# Altium PCB EEU_SSSHIpin.PcbDoc (part 1 of 2)
Units mil, origin at the board's own origin, x right, y up, seen from the top; angles counter-clockwise.
Board outline 6000 x 4000 mil, 2 copper layers (Top Layer, Bottom Layer); 240 components, 16 nets, 1184 pads, 256 vias.
Unrouted connection lines stored in the file: 240.
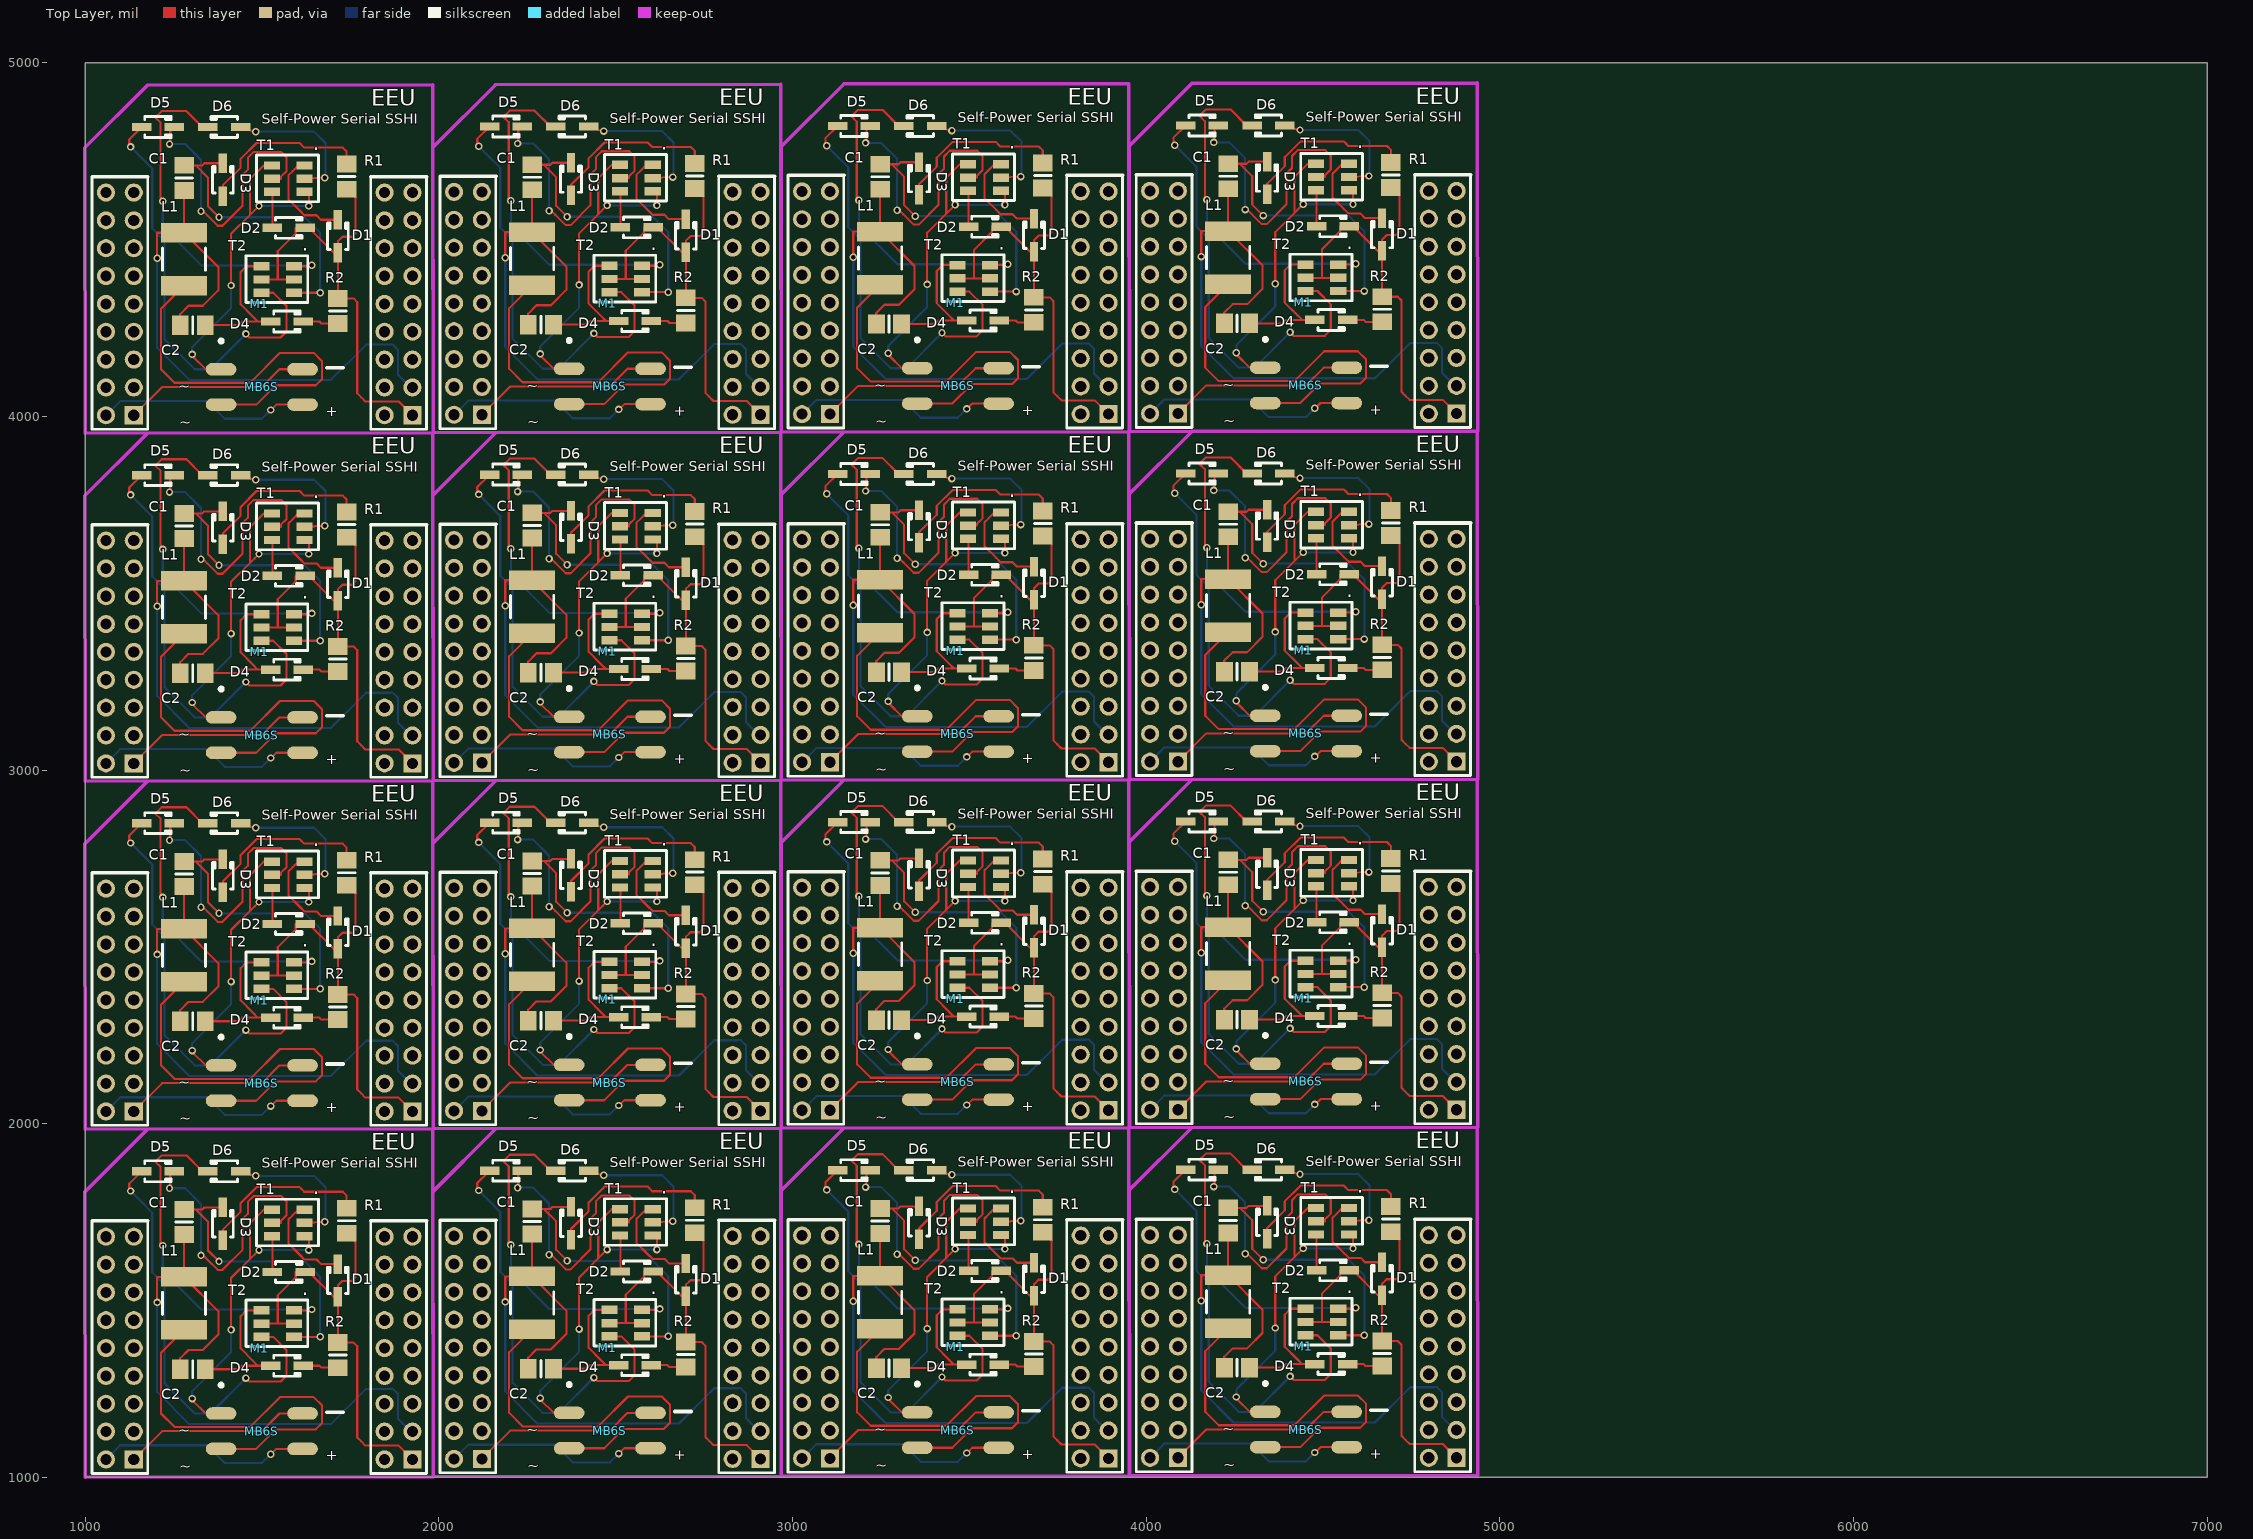
[diagram p0: Top Layer view]
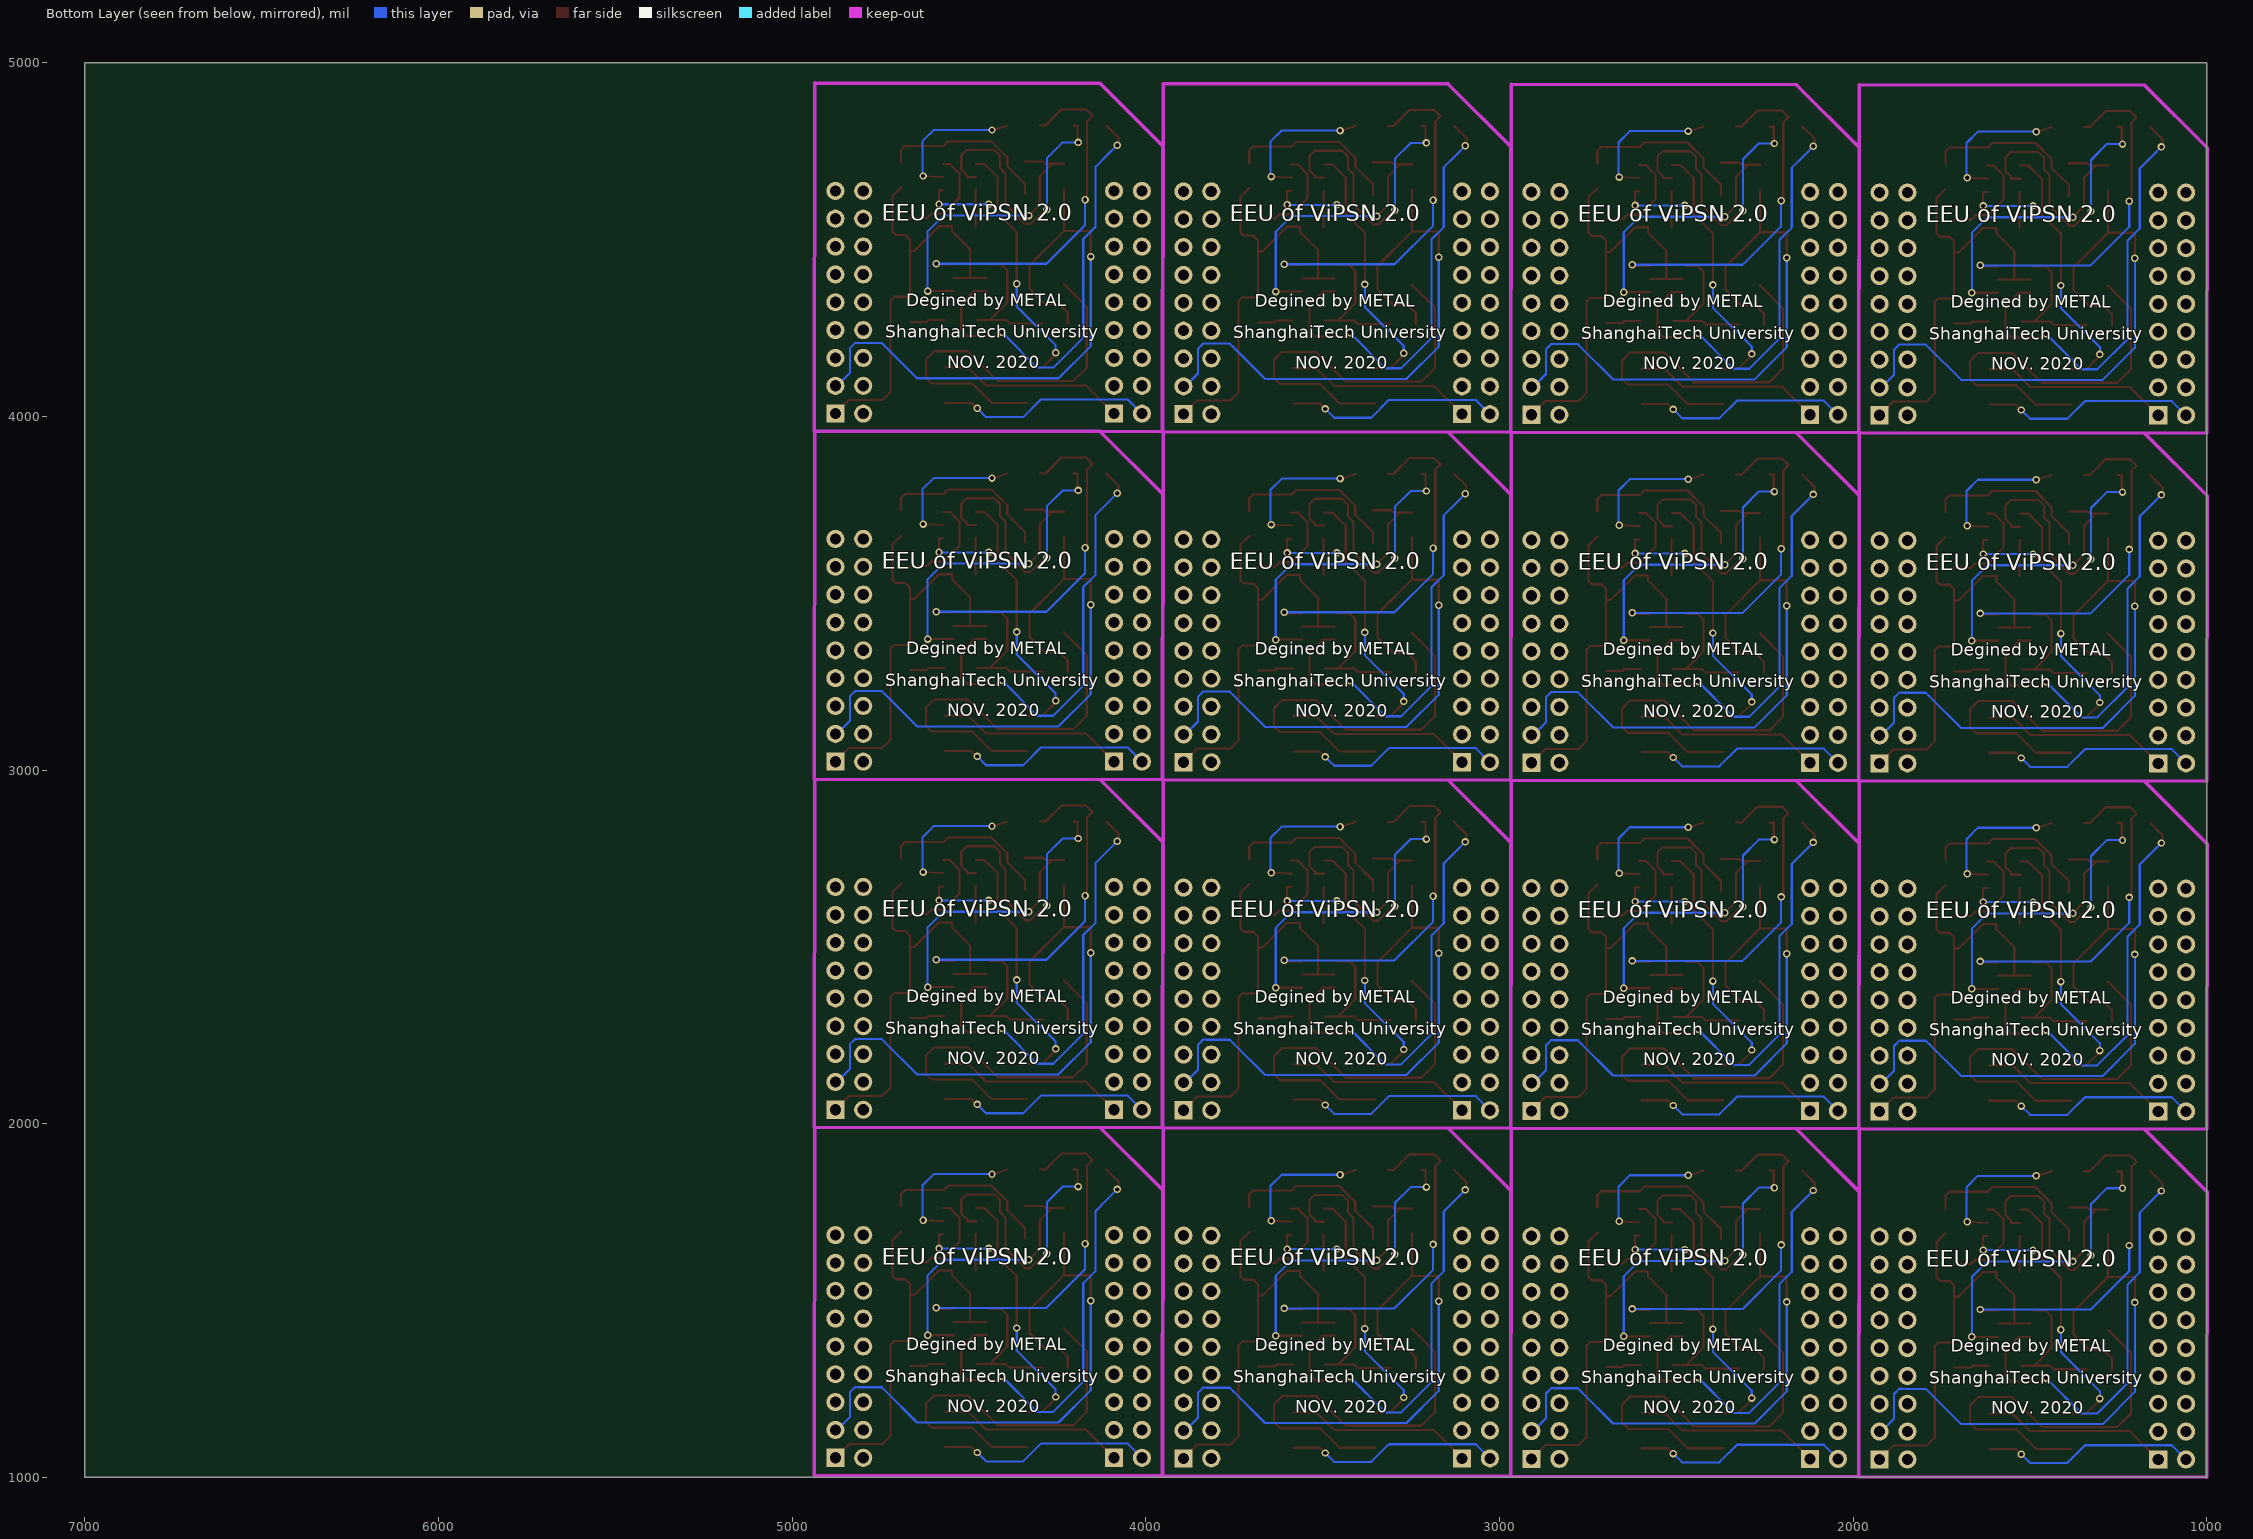
[diagram p1: Bottom Layer view, seen from below]

## Layer stack, top to bottom
Top Layer: signal copper 1.4
Dielectric: dielectric 12.6, FR-4, Dk 4.8
Bottom Layer: signal copper 1.4

## Board outline
1000,1000 7000,1000 7000,5000 1000,5000

## Design rules (kind name [scope] priority, off if disabled: settings)
Clearance [All] p1: gap=10
PolygonConnect [All] p1: connectstyle=Relief reliefconductorwidth=10 reliefentries=4 polygonreliefangle="90 Angle"
RoutingVias [All] p1: holewidth=28 width=50 viastyle="Through Hole" minholewidth=28 minwidth=50 maxholewidth=28 maxwidth=50
SilkscreenOverComponentPads [All] p1: minsilkscreentomaskgap=10
SolderMaskExpansion [All] p1: expansion=4
Width [All] p1: maxlimit=10 minlimit=10 preferedwidth=10
27 further rules are at their usual default settings.

## Components (designator, comment, footprint, x,y, rotation, side; value= is the part's Value field where it differs from the comment)
C1 "CAP" 6-0805_N 4231.76,4679.5 r90 top
C1 "CAP" 6-0805_N 4231.76,3695.25 r90 top
C1 "CAP" 6-0805_N 4231.76,2710.99 r90 top
C1 "CAP" 6-0805_N 4231.76,1726.74 r90 top
C1 "CAP" 6-0805_N 3247.51,4677.95 r90 top
C1 "CAP" 6-0805_N 3247.51,3693.7 r90 top
C1 "CAP" 6-0805_N 3247.51,2709.45 r90 top
C1 "CAP" 6-0805_N 3247.51,1725.19 r90 top
C1 "CAP" 6-0805_N 2263.26,4676.4 r90 top
C1 "CAP" 6-0805_N 2263.26,3692.15 r90 top
C1 "CAP" 6-0805_N 2263.26,2707.9 r90 top
C1 "CAP" 6-0805_N 2263.26,1723.65 r90 top
C1 "CAP" 6-0805_N 1279,4674.85 r90 top
C1 "CAP" 6-0805_N 1279,3690.6 r90 top
C1 "CAP" 6-0805_N 1279,2706.35 r90 top
C1 "CAP" 6-0805_N 1279,1722.1 r90 top
C2 "CAP" 6-0805_N 4256.76,4263.2 r0 top
C2 "CAP" 6-0805_N 4256.76,3278.95 r0 top
C2 "CAP" 6-0805_N 4256.76,2294.69 r0 top
C2 "CAP" 6-0805_N 4256.76,1310.44 r0 top
C2 "CAP" 6-0805_N 3272.51,4261.65 r0 top
C2 "CAP" 6-0805_N 3272.51,3277.4 r0 top
C2 "CAP" 6-0805_N 3272.51,2293.15 r0 top
C2 "CAP" 6-0805_N 3272.51,1308.89 r0 top
C2 "CAP" 6-0805_N 2288.26,4260.1 r0 top
C2 "CAP" 6-0805_N 2288.26,3275.85 r0 top
C2 "CAP" 6-0805_N 2288.26,2291.6 r0 top
C2 "CAP" 6-0805_N 2288.26,1307.35 r0 top
C2 "CAP" 6-0805_N 1304,4258.55 r0 top
C2 "CAP" 6-0805_N 1304,3274.3 r0 top
C2 "CAP" 6-0805_N 1304,2290.05 r0 top
C2 "CAP" 6-0805_N 1304,1305.8 r0 top
D1 "NRS0240H" SOD323 4666.76,4468.2 r90 top
D1 "NRS0240H" SOD323 4666.76,3483.95 r90 top
D1 "NRS0240H" SOD323 4666.76,2499.69 r90 top
D1 "NRS0240H" SOD323 4666.76,1515.44 r90 top
D1 "NRS0240H" SOD323 3682.51,4466.65 r90 top
D1 "NRS0240H" SOD323 3682.51,3482.4 r90 top
D1 "NRS0240H" SOD323 3682.51,2498.15 r90 top
D1 "NRS0240H" SOD323 3682.51,1513.89 r90 top
D1 "NRS0240H" SOD323 2698.26,4465.1 r90 top
D1 "NRS0240H" SOD323 2698.26,3480.85 r90 top
D1 "NRS0240H" SOD323 2698.26,2496.6 r90 top
D1 "NRS0240H" SOD323 2698.26,1512.35 r90 top
D1 "NRS0240H" SOD323 1714,4463.55 r90 top
D1 "NRS0240H" SOD323 1714,3479.3 r90 top
D1 "NRS0240H" SOD323 1714,2495.05 r90 top
D1 "NRS0240H" SOD323 1714,1510.8 r90 top
D2 "NRS0240H" SOD323 4481.76,4538.2 r0 top
D2 "NRS0240H" SOD323 4481.76,3553.95 r0 top
D2 "NRS0240H" SOD323 4481.76,2569.69 r0 top
D2 "NRS0240H" SOD323 4481.76,1585.44 r0 top
D2 "NRS0240H" SOD323 3497.51,4536.65 r0 top
D2 "NRS0240H" SOD323 3497.51,3552.4 r0 top
D2 "NRS0240H" SOD323 3497.51,2568.15 r0 top
D2 "NRS0240H" SOD323 3497.51,1583.89 r0 top
D2 "NRS0240H" SOD323 2513.26,4535.1 r0 top
D2 "NRS0240H" SOD323 2513.26,3550.85 r0 top
D2 "NRS0240H" SOD323 2513.26,2566.6 r0 top
D2 "NRS0240H" SOD323 2513.26,1582.35 r0 top
D2 "NRS0240H" SOD323 1529,4533.55 r0 top
D2 "NRS0240H" SOD323 1529,3549.3 r0 top
D2 "NRS0240H" SOD323 1529,2565.05 r0 top
D2 "NRS0240H" SOD323 1529,1580.8 r0 top
D3 "NRS0240H" SOD323 4341.76,4628.2 r90 top
D3 "NRS0240H" SOD323 4341.76,3643.95 r90 top
D3 "NRS0240H" SOD323 4341.76,2659.69 r90 top
D3 "NRS0240H" SOD323 4341.76,1675.44 r90 top
D3 "NRS0240H" SOD323 3357.51,4626.65 r90 top
D3 "NRS0240H" SOD323 3357.51,3642.4 r90 top
D3 "NRS0240H" SOD323 3357.51,2658.15 r90 top
D3 "NRS0240H" SOD323 3357.51,1673.89 r90 top
D3 "NRS0240H" SOD323 2373.26,4625.1 r90 top
D3 "NRS0240H" SOD323 2373.26,3640.85 r90 top
D3 "NRS0240H" SOD323 2373.26,2656.6 r90 top
D3 "NRS0240H" SOD323 2373.26,1672.35 r90 top
D3 "NRS0240H" SOD323 1389,4623.55 r90 top
D3 "NRS0240H" SOD323 1389,3639.3 r90 top
D3 "NRS0240H" SOD323 1389,2655.05 r90 top
D3 "NRS0240H" SOD323 1389,1670.8 r90 top
D4 "NRS0240H" SOD323 4476.76,4273.2 r0 top
D4 "NRS0240H" SOD323 4476.76,3288.95 r0 top
D4 "NRS0240H" SOD323 4476.76,2304.69 r0 top
D4 "NRS0240H" SOD323 4476.76,1320.44 r0 top
D4 "NRS0240H" SOD323 3492.51,4271.65 r0 top
D4 "NRS0240H" SOD323 3492.51,3287.4 r0 top
D4 "NRS0240H" SOD323 3492.51,2303.15 r0 top
D4 "NRS0240H" SOD323 3492.51,1318.89 r0 top
D4 "NRS0240H" SOD323 2508.26,4270.1 r0 top
D4 "NRS0240H" SOD323 2508.26,3285.85 r0 top
D4 "NRS0240H" SOD323 2508.26,2301.6 r0 top
D4 "NRS0240H" SOD323 2508.26,1317.35 r0 top
D4 "NRS0240H" SOD323 1524,4268.55 r0 top
D4 "NRS0240H" SOD323 1524,3284.3 r0 top
D4 "NRS0240H" SOD323 1524,2300.05 r0 top
D4 "NRS0240H" SOD323 1524,1315.8 r0 top
D5 "NRS0240H" SOD323 4111.76,4823.2 r0 top
D5 "NRS0240H" SOD323 4111.76,3838.95 r0 top
D5 "NRS0240H" SOD323 4111.76,2854.69 r0 top
D5 "NRS0240H" SOD323 4111.76,1870.44 r0 top
D5 "NRS0240H" SOD323 3127.51,4821.65 r0 top
D5 "NRS0240H" SOD323 3127.51,3837.4 r0 top
D5 "NRS0240H" SOD323 3127.51,2853.15 r0 top
D5 "NRS0240H" SOD323 3127.51,1868.89 r0 top
D5 "NRS0240H" SOD323 2143.26,4820.1 r0 top
D5 "NRS0240H" SOD323 2143.26,3835.85 r0 top
D5 "NRS0240H" SOD323 2143.26,2851.6 r0 top
D5 "NRS0240H" SOD323 2143.26,1867.35 r0 top
D5 "NRS0240H" SOD323 1159,4818.55 r0 top
D5 "NRS0240H" SOD323 1159,3834.3 r0 top
D5 "NRS0240H" SOD323 1159,2850.05 r0 top
D5 "NRS0240H" SOD323 1159,1865.8 r0 top
D6 "NRS0240H" SOD323 4391.76,4823.2 r180 top
D6 "NRS0240H" SOD323 4391.76,3838.95 r180 top
D6 "NRS0240H" SOD323 4391.76,2854.69 r180 top
D6 "NRS0240H" SOD323 4391.76,1870.44 r180 top
D6 "NRS0240H" SOD323 3407.51,4821.65 r180 top
D6 "NRS0240H" SOD323 3407.51,3837.4 r180 top
D6 "NRS0240H" SOD323 3407.51,2853.15 r180 top
D6 "NRS0240H" SOD323 3407.51,1868.89 r180 top
D6 "NRS0240H" SOD323 2423.26,4820.1 r180 top
D6 "NRS0240H" SOD323 2423.26,3835.85 r180 top
D6 "NRS0240H" SOD323 2423.26,2851.6 r180 top
D6 "NRS0240H" SOD323 2423.26,1867.35 r180 top
D6 "NRS0240H" SOD323 1439,4818.55 r180 top
D6 "NRS0240H" SOD323 1439,3834.3 r180 top
D6 "NRS0240H" SOD323 1439,2850.05 r180 top
D6 "NRS0240H" SOD323 1439,1865.8 r180 top
L1 "1mH" 1812 4231.76,4449.5 r270 top
L1 "1mH" 1812 4231.76,3465.25 r270 top
L1 "1mH" 1812 4231.76,2480.99 r270 top
L1 "1mH" 1812 4231.76,1496.74 r270 top
L1 "1mH" 1812 3247.51,4447.95 r270 top
L1 "1mH" 1812 3247.51,3463.7 r270 top
L1 "1mH" 1812 3247.51,2479.45 r270 top
L1 "1mH" 1812 3247.51,1495.19 r270 top
L1 "1mH" 1812 2263.26,4446.4 r270 top
L1 "1mH" 1812 2263.26,3462.15 r270 top
L1 "1mH" 1812 2263.26,2477.9 r270 top
L1 "1mH" 1812 2263.26,1493.65 r270 top
L1 "1mH" 1812 1279,4444.85 r270 top
L1 "1mH" 1812 1279,3460.6 r270 top
L1 "1mH" 1812 1279,2476.35 r270 top
L1 "1mH" 1812 1279,1492.1 r270 top
M1 "MHDR2X18" MODULE9X4 4876.76,4638.2 r180 top
M1 "MHDR2X18" MODULE9X4 4876.76,3653.95 r180 top
M1 "MHDR2X18" MODULE9X4 4876.76,2669.69 r180 top
M1 "MHDR2X18" MODULE9X4 4876.76,1685.44 r180 top
M1 "MHDR2X18" MODULE9X4 3892.51,4636.65 r180 top
M1 "MHDR2X18" MODULE9X4 3892.51,3652.4 r180 top
M1 "MHDR2X18" MODULE9X4 3892.51,2668.15 r180 top
M1 "MHDR2X18" MODULE9X4 3892.51,1683.89 r180 top
M1 "MHDR2X18" MODULE9X4 2908.26,4635.1 r180 top
M1 "MHDR2X18" MODULE9X4 2908.26,3650.85 r180 top
M1 "MHDR2X18" MODULE9X4 2908.26,2666.6 r180 top
M1 "MHDR2X18" MODULE9X4 2908.26,1682.35 r180 top
M1 "MHDR2X18" MODULE9X4 1924,4633.55 r180 top
M1 "MHDR2X18" MODULE9X4 1924,3649.3 r180 top
M1 "MHDR2X18" MODULE9X4 1924,2665.05 r180 top
M1 "MHDR2X18" MODULE9X4 1924,1680.8 r180 top
MB6S "Header 2X2" MB6S 4451.76,4088.2 r0 top
MB6S "Header 2X2" MB6S 4451.76,3103.95 r0 top
MB6S "Header 2X2" MB6S 4451.76,2119.69 r0 top
MB6S "Header 2X2" MB6S 4451.76,1135.44 r0 top
MB6S "Header 2X2" MB6S 3467.51,4086.65 r0 top
MB6S "Header 2X2" MB6S 3467.51,3102.4 r0 top
MB6S "Header 2X2" MB6S 3467.51,2118.15 r0 top
MB6S "Header 2X2" MB6S 3467.51,1133.89 r0 top
MB6S "Header 2X2" MB6S 2483.26,4085.1 r0 top
MB6S "Header 2X2" MB6S 2483.26,3100.85 r0 top
MB6S "Header 2X2" MB6S 2483.26,2116.6 r0 top
MB6S "Header 2X2" MB6S 2483.26,1132.35 r0 top
MB6S "Header 2X2" MB6S 1499,4083.55 r0 top
MB6S "Header 2X2" MB6S 1499,3099.3 r0 top
MB6S "Header 2X2" MB6S 1499,2115.05 r0 top
MB6S "Header 2X2" MB6S 1499,1130.8 r0 top
R1 "Res1" 6-0805_N 4691.76,4683.2 r270 top
R1 "Res1" 6-0805_N 4691.76,3698.95 r270 top
R1 "Res1" 6-0805_N 4691.76,2714.69 r270 top
R1 "Res1" 6-0805_N 4691.76,1730.44 r270 top
R1 "Res1" 6-0805_N 3707.51,4681.65 r270 top
R1 "Res1" 6-0805_N 3707.51,3697.4 r270 top
R1 "Res1" 6-0805_N 3707.51,2713.15 r270 top
R1 "Res1" 6-0805_N 3707.51,1728.89 r270 top
R1 "Res1" 6-0805_N 2723.26,4680.1 r270 top
R1 "Res1" 6-0805_N 2723.26,3695.85 r270 top
R1 "Res1" 6-0805_N 2723.26,2711.6 r270 top
R1 "Res1" 6-0805_N 2723.26,1727.35 r270 top
R1 "Res1" 6-0805_N 1739,4678.55 r270 top
R1 "Res1" 6-0805_N 1739,3694.3 r270 top
R1 "Res1" 6-0805_N 1739,2710.05 r270 top
R1 "Res1" 6-0805_N 1739,1725.8 r270 top
R2 "Res1" 6-0805_N 4666.76,4303.2 r90 top
R2 "Res1" 6-0805_N 4666.76,3318.95 r90 top
R2 "Res1" 6-0805_N 4666.76,2334.69 r90 top
R2 "Res1" 6-0805_N 4666.76,1350.44 r90 top
R2 "Res1" 6-0805_N 3682.51,4301.65 r90 top
R2 "Res1" 6-0805_N 3682.51,3317.4 r90 top
R2 "Res1" 6-0805_N 3682.51,2333.15 r90 top
R2 "Res1" 6-0805_N 3682.51,1348.89 r90 top
R2 "Res1" 6-0805_N 2698.26,4300.1 r90 top
R2 "Res1" 6-0805_N 2698.26,3315.85 r90 top
R2 "Res1" 6-0805_N 2698.26,2331.6 r90 top
R2 "Res1" 6-0805_N 2698.26,1347.35 r90 top
R2 "Res1" 6-0805_N 1714,4298.55 r90 top
R2 "Res1" 6-0805_N 1714,3314.3 r90 top
R2 "Res1" 6-0805_N 1714,2330.05 r90 top
R2 "Res1" 6-0805_N 1714,1345.8 r90 top
T1 "XN4601" XN4601 4571.76,4638.2 r180 top
T1 "XN4601" XN4601 4571.76,3653.95 r180 top
T1 "XN4601" XN4601 4571.76,2669.69 r180 top
T1 "XN4601" XN4601 4571.76,1685.44 r180 top
T1 "XN4601" XN4601 3587.51,4636.65 r180 top
T1 "XN4601" XN4601 3587.51,3652.4 r180 top
T1 "XN4601" XN4601 3587.51,2668.15 r180 top
T1 "XN4601" XN4601 3587.51,1683.89 r180 top
T1 "XN4601" XN4601 2603.26,4635.1 r180 top
T1 "XN4601" XN4601 2603.26,3650.85 r180 top
T1 "XN4601" XN4601 2603.26,2666.6 r180 top
T1 "XN4601" XN4601 2603.26,1682.35 r180 top
T1 "XN4601" XN4601 1619,4633.55 r180 top
T1 "XN4601" XN4601 1619,3649.3 r180 top
T1 "XN4601" XN4601 1619,2665.05 r180 top
T1 "XN4601" XN4601 1619,1680.8 r180 top
T2 "XN4601" XN4601 4541.76,4353.2 r180 top
T2 "XN4601" XN4601 4541.76,3368.95 r180 top
T2 "XN4601" XN4601 4541.76,2384.69 r180 top
T2 "XN4601" XN4601 4541.76,1400.44 r180 top
T2 "XN4601" XN4601 3557.51,4351.65 r180 top
T2 "XN4601" XN4601 3557.51,3367.4 r180 top
T2 "XN4601" XN4601 3557.51,2383.15 r180 top
T2 "XN4601" XN4601 3557.51,1398.89 r180 top
T2 "XN4601" XN4601 2573.26,4350.1 r180 top
T2 "XN4601" XN4601 2573.26,3365.85 r180 top
T2 "XN4601" XN4601 2573.26,2381.6 r180 top
T2 "XN4601" XN4601 2573.26,1397.35 r180 top
T2 "XN4601" XN4601 1589,4348.55 r180 top
T2 "XN4601" XN4601 1589,3364.3 r180 top
T2 "XN4601" XN4601 1589,2380.05 r180 top
T2 "XN4601" XN4601 1589,1395.8 r180 top

## Footprints (in the part's own frame and the unit in brackets; to place one, negate y for a bottom-side part, rotate by r counter-clockwise, add the part's x,y. Pads: shape width x height; smd on the part's side, far side on the other; paste and mask are expansions set on the pad)
6-0805_N [mm] "Chip Resistor, Body 2.0x1.2mm, IPC Medium Density"
  rect 1.2x1.4 smd: 1(-0.9,0) 2(0.9,0)
  silkscreen extent 0,-0.6 0,0.6, body extent -1.07,-0.7 1.07,0.7, height 0.7
1812 [mm] "Chip Capacitor, Body 4.5x3.2mm, IPC High Density"
  rect 1.4x3.3 smd: 1(-1.9,0) 2(1.9,0)
  silkscreen extent -0.8,-1.55 0.8,1.55, body extent -2.4,-1.7 2.4,1.7, height 1.4
MB6S [mm] "SOP127P600-8N"
  oval 2.2x0.9 smd: 1(-2.925,1.27) 2(2.925,1.27) 3(-2.925,-1.27) 4(2.925,-1.27)
  silkscreen extent -3.04,1.37 5.84,3.43, body extent -2.05,-2.47 2.05,2.47, height 2.9
MODULE9X4 [mm]
  rect 1.3x1.3 hole 0.8: 1(-0.025,16.002) 36(19.99,16.002)
  round 1.3 hole 0.8: 2(21.99,16.002) 3(-0.025,14.002) 4(21.99,14.002) 5(-0.025,12.002) 6(21.99,12.002) 7(-0.025,10.002) 8(21.99,10.002) 9(-0.025,8.002) 10(21.99,8.002) 11(-0.025,6.002) 12(21.99,6.002) 13(-0.025,4.002) 14(21.99,4.002) 15(-0.025,2.002) 16(21.99,2.002) 17(-0.025,0.002) 18(21.99,0.002) 19(1.975,0.002) 20(19.99,0.002) 21(1.975,2.002) 22(19.99,2.002) 23(1.975,4.002) 24(19.99,4.002) 25(1.975,6.002) 26(19.99,6.002) 27(1.975,8.002) 28(19.99,8.002) 29(1.975,10.002) 30(19.99,10.002) 31(1.975,12.002) 32(19.99,12.002) 33(1.975,14.002) 34(19.99,14.002) 35(1.975,16.002)
  silkscreen extent -1.04,-1.14 22.99,17
SOD323 [mm] "0805"
  rect 1.4x0.6 smd: 1(0,0) 2(2.35,0)
  silkscreen extent 0.22,-0.75 2.13,0.75, body extent -0.17,-0.67 2.43,0.63, height 1
XN4601 [mm]
  rect 1.15x0.6 smd: 1(-0.032,-1.941) 2(-0.032,-0.991) 3(-0.032,-0.041) 4(2.318,-0.041) 5(2.318,-0.991) 6(2.318,-1.941)
  silkscreen extent -1.02,-2.69 3.43,0.66, body extent 0.27,-2.54 2.02,0.56, height 1.3

## Part data
C1 C1 C1 C1 C1 C1 C1 C1 C1 C1 C1 C1 C1 C1 C1 C1 C2 C2 C2 C2 C2 C2 C2 C2 C2 C2 C2 C2 C2 C2 C2 C2: "Capacitor"
D1 D1 D1 D1 D1 D1 D1 D1 D1 D1 D1 D1 D1 D1 D1 D1 D2 D2 D2 D2 D2 D2 D2 D2 D2 D2 D2 D2 D2 D2 D2 D2 D3 D3 D3 D3 D3 D3 D3 D3 D3 D3 D3 D3 D3 D3 D3 D3 D4 D4 D4 D4 D4 D4 D4 D4 D4 D4 D4 D4 D4 D4 D4 D4 D5 D5 D5 D5 D5 D5 D5 D5 D5 D5 D5 D5 D5 D5 D5 D5 D6 D6 D6 D6 D6 D6 D6 D6 D6 D6 D6 D6 D6 D6 D6 D6: library part "Diode 1N4004", "1 Amp General Purpose Rectifier"
L1 L1 L1 L1 L1 L1 L1 L1 L1 L1 L1 L1 L1 L1 L1 L1: library part INDUCTOR
M1 M1 M1 M1 M1 M1 M1 M1 M1 M1 M1 M1 M1 M1 M1 M1: "Header, 18-Pin, Dual row"
MB6S MB6S MB6S MB6S MB6S MB6S MB6S MB6S MB6S MB6S MB6S MB6S MB6S MB6S MB6S MB6S: "Header, 2-Pin, Dual row"
R1 R1 R1 R1 R1 R1 R1 R1 R1 R1 R1 R1 R1 R1 R1 R1 R2 R2 R2 R2 R2 R2 R2 R2 R2 R2 R2 R2 R2 R2 R2 R2: "Resistor"
T1 T1 T1 T1 T1 T1 T1 T1 T1 T1 T1 T1 T1 T1 T1 T1 T2 T2 T2 T2 T2 T2 T2 T2 T2 T2 T2 T2 T2 T2 T2 T2: "Composite Transistors"

## Via types
v1: diameter 21, hole 12, Top Layer to Bottom Layer, 256 vias

## Nets (pads, with @x,y where several pads share a name; then routed paths per layer and width w, separated by ;. In a path a pad name is that pad's centre, name@x,y a point inside that pad or via, vN(x,y) a via of type N, cw(c..) or ccw(c..) an arc to the next point about the centre after c; other vN are vias at no path point)
AC1: L1.2 MB6S.3 | length 18315.8
  Top Layer w6: L1.2@1279,1417.29 1214,1352.29 1214,1180.8 1252,1142.8 1466,1142.8 1550.34,1227.13 1569,1227.13 1645.67,1227.13 1669,1203.8 1669,1152.8 1652,1135.8 1538,1135.8 1483,1080.8 MB6S.3@1383.85,1080.8 ; L1.2@1279,2401.55 1214,2336.55 1214,2165.05 1252,2127.05 1466,2127.05 1550.34,2211.39 1569,2211.39 1645.67,2211.39 1669,2188.05 1669,2137.05 1652,2120.05 1538,2120.05 1483,2065.05 MB6S.3@1383.85,2065.05 ; L1.2@1279,3385.8 1214,3320.8 1214,3149.3 1252,3111.3 1466,3111.3 1550.34,3195.64 1569,3195.64 1645.67,3195.64 1669,3172.3 1669,3121.3 1652,3104.3 1538,3104.3 1483,3049.3 MB6S.3@1383.85,3049.3 ; L1.2@1279,4370.05 1214,4305.05 1214,4133.55 1252,4095.55 1466,4095.55 1550.34,4179.89 1569,4179.89 1645.67,4179.89 1669,4156.55 1669,4105.55 1652,4088.55 1538,4088.55 1483,4033.55 MB6S.3@1383.85,4033.55 ; L1.2@2263.26,1418.84 2198.26,1353.84 2198.26,1182.35 2236.26,1144.35 2450.26,1144.35 2534.59,1228.68 2553.26,1228.68 2629.92,1228.68 2653.26,1205.35 2653.26,1154.35 2636.26,1137.35 2522.26,1137.35 2467.26,1082.35 MB6S.3@2368.1,1082.35 ; L1.2@2263.26,2403.09 2198.26,2338.09 2198.26,2166.6 2236.26,2128.6 2450.26,2128.6 2534.59,2212.93 2553.26,2212.93 2629.92,2212.93 2653.26,2189.6 2653.26,2138.6 2636.26,2121.6 2522.26,2121.6 2467.26,2066.6 MB6S.3@2368.1,2066.6 ; L1.2@2263.26,3387.35 2198.26,3322.35 2198.26,3150.85 2236.26,3112.85 2450.26,3112.85 2534.59,3197.19 2553.26,3197.19 2629.92,3197.19 2653.26,3173.85 2653.26,3122.85 2636.26,3105.85 2522.26,3105.85 2467.26,3050.85 MB6S.3@2368.1,3050.85 ; L1.2@2263.26,4371.6 2198.26,4306.6 2198.26,4135.1 2236.26,4097.1 2450.26,4097.1 2534.59,4181.44 2553.26,4181.44 2629.92,4181.44 2653.26,4158.1 2653.26,4107.1 2636.26,4090.1 2522.26,4090.1 2467.26,4035.1 MB6S.3@2368.1,4035.1 ; L1.2@3247.51,1420.39 3182.51,1355.39 3182.51,1183.89 3220.51,1145.89 3434.51,1145.89 3518.84,1230.23 3537.51,1230.23 3614.17,1230.23 3637.51,1206.89 3637.51,1155.89 3620.51,1138.89 3506.51,1138.89 3451.51,1083.89 MB6S.3@3352.35,1083.89 ; L1.2@3247.51,2404.64 3182.51,2339.64 3182.51,2168.15 3220.51,2130.15 3434.51,2130.15 3518.84,2214.48 3537.51,2214.48 3614.17,2214.48 3637.51,2191.15 3637.51,2140.15 3620.51,2123.15 3506.51,2123.15 3451.51,2068.15 MB6S.3@3352.35,2068.15 ; L1.2@3247.51,3388.89 3182.51,3323.89 3182.51,3152.4 3220.51,3114.4 3434.51,3114.4 3518.84,3198.73 3537.51,3198.73 3614.17,3198.73 3637.51,3175.4 3637.51,3124.4 3620.51,3107.4 3506.51,3107.4 3451.51,3052.4 MB6S.3@3352.35,3052.4 ; L1.2@3247.51,4373.15 3182.51,4308.15 3182.51,4136.65 3220.51,4098.65 3434.51,4098.65 3518.84,4182.99 3537.51,4182.99 3614.17,4182.99 3637.51,4159.65 3637.51,4108.65 3620.51,4091.65 3506.51,4091.65 3451.51,4036.65 MB6S.3@3352.35,4036.65 ; L1.2@4231.76,1421.94 4166.76,1356.94 4166.76,1185.44 4204.76,1147.44 4418.76,1147.44 4503.1,1231.78 4521.76,1231.78 4598.42,1231.78 4621.76,1208.44 4621.76,1157.44 4604.76,1140.44 4490.76,1140.44 4435.76,1085.44 MB6S.3@4336.6,1085.44 ; L1.2@4231.76,2406.19 4166.76,2341.19 4166.76,2169.69 4204.76,2131.69 4418.76,2131.69 4503.1,2216.03 4521.76,2216.03 4598.42,2216.03 4621.76,2192.69 4621.76,2141.69 4604.76,2124.69 4490.76,2124.69 4435.76,2069.69 MB6S.3@4336.6,2069.69 ; L1.2@4231.76,3390.44 4166.76,3325.44 4166.76,3153.95 4204.76,3115.95 4418.76,3115.95 4503.1,3200.28 4521.76,3200.28 4598.42,3200.28 4621.76,3176.95 4621.76,3125.95 4604.76,3108.95 4490.76,3108.95 4435.76,3053.95 MB6S.3@4336.6,3053.95 ; L1.2@4231.76,4374.69 4166.76,4309.69 4166.76,4138.2 4204.76,4100.2 4418.76,4100.2 4503.1,4184.53 4521.76,4184.53 4598.42,4184.53 4621.76,4161.2 4621.76,4110.2 4604.76,4093.2 4490.76,4093.2 4435.76,4038.2 MB6S.3@4336.6,4038.2
AC2: MB6S.1 T1.3 T1.6 | length 15756.4
  Top Layer w6: v1@1304,1216.8 1340,1180.8 MB6S.1@1383.85,1180.8 ; v1@1304,2201.05 1340,2165.05 MB6S.1@1383.85,2165.05 ; v1@1304,3185.3 1340,3149.3 MB6S.1@1383.85,3149.3 ; v1@1304,4169.55 1340,4133.55 MB6S.1@1383.85,4133.55 ; v1(1412,1417.8) 1412,1563.8 1466.02,1617.82 ; v1(1412,2402.05) 1412,2548.05 1466.02,2602.07 ; v1(1412,3386.3) 1412,3532.3 1466.02,3586.32 ; v1(1412,4370.55) 1412,4516.55 1466.02,4570.57 ; 1466.02,1680.8 1466.02,1660.26 ; 1466.02,2665.05 1466.02,2644.51 ; 1466.02,3649.3 1466.02,3628.76 ; 1466.02,4633.55 1466.02,4613.01 ; v1(1491,1642.8) 1479,1630.8 1466.02,1617.82 ; v1(1491,2627.05) 1479,2615.05 1466.02,2602.07 ; v1(1491,3611.3) 1479,3599.3 1466.02,3586.32 ; v1(1491,4595.55) 1479,4583.55 1466.02,4570.57 ; T1.6@1527.74,1757.2 1504,1757.2 1466.02,1719.22 1466.02,1660.26 ; T1.6@1527.74,2741.45 1504,2741.45 1466.02,2703.47 1466.02,2644.51 ; T1.6@1527.74,3725.7 1504,3725.7 1466.02,3687.72 1466.02,3628.76 ; T1.6@1527.74,4709.96 1504,4709.96 1466.02,4671.98 1466.02,4613.01 ; T1.3@1620.26,1682.4 1632,1682.4 v1(1632,1642.8) ; T1.3@1620.26,2666.65 1632,2666.65 v1(1632,2627.05) ; T1.3@1620.26,3650.9 1632,3650.9 v1(1632,3611.3) ; T1.3@1620.26,4635.15 1632,4635.15 v1(1632,4595.55) ; v1@2288.26,1218.35 2324.26,1182.35 MB6S.1@2368.1,1182.35 ; v1@2288.26,2202.6 2324.26,2166.6 MB6S.1@2368.1,2166.6 ; v1@2288.26,3186.85 2324.26,3150.85 MB6S.1@2368.1,3150.85 ; v1@2288.26,4171.1 2324.26,4135.1 MB6S.1@2368.1,4135.1 ; v1(2396.26,1419.35) 2396.26,1565.35 2450.28,1619.37 ; v1(2396.26,2403.6) 2396.26,2549.6 2450.28,2603.62 ; v1(2396.26,3387.85) 2396.26,3533.85 2450.28,3587.87 ; v1(2396.26,4372.1) 2396.26,4518.1 2450.28,4572.12 ; 2450.28,1682.35 2450.28,1661.81 ; 2450.28,2666.6 2450.28,2646.06 ; 2450.28,3650.85 2450.28,3630.31 ; 2450.28,4635.1 2450.28,4614.56 ; v1(2475.26,1644.35) 2463.26,1632.35 2450.28,1619.37 ; v1(2475.26,2628.6) 2463.26,2616.6 2450.28,2603.62 ; v1(2475.26,3612.85) 2463.26,3600.85 2450.28,3587.87 ; v1(2475.26,4597.1) 2463.26,4585.1 2450.28,4572.12 ; T1.6@2512,1758.75 2488.26,1758.75 2450.28,1720.77 2450.28,1661.81 ; T1.6@2512,2743 2488.26,2743 2450.28,2705.02 2450.28,2646.06 ; T1.6@2512,3727.25 2488.26,3727.25 2450.28,3689.27 2450.28,3630.31 ; T1.6@2512,4711.5 2488.26,4711.5 2450.28,4673.52 2450.28,4614.56 ; T1.3@2604.52,1683.94 2616.26,1683.94 v1(2616.26,1644.35) ; T1.3@2604.52,2668.2 2616.26,2668.2 v1(2616.26,2628.6) ; T1.3@2604.52,3652.45 2616.26,3652.45 v1(2616.26,3612.85) ; T1.3@2604.52,4636.7 2616.26,4636.7 v1(2616.26,4597.1) ; v1@3272.51,1219.89 3308.51,1183.89 MB6S.1@3352.35,1183.89 ; v1@3272.51,2204.15 3308.51,2168.15 MB6S.1@3352.35,2168.15 ; v1@3272.51,3188.4 3308.51,3152.4 MB6S.1@3352.35,3152.4 ; v1@3272.51,4172.65 3308.51,4136.65 MB6S.1@3352.35,4136.65 ; v1(3380.51,1420.89) 3380.51,1566.89 3434.53,1620.91 ; v1(3380.51,2405.15) 3380.51,2551.15 3434.53,2605.17 ; v1(3380.51,3389.4) 3380.51,3535.4 3434.53,3589.42 ; v1(3380.51,4373.65) 3380.51,4519.65 3434.53,4573.67 ; 3434.53,1683.89 3434.53,1663.35 ; 3434.53,2668.15 3434.53,2647.61 ; 3434.53,3652.4 3434.53,3631.86 ; 3434.53,4636.65 3434.53,4616.11 ; v1(3459.51,1645.89) 3447.51,1633.89 3434.53,1620.91 ; v1(3459.51,2630.15) 3447.51,2618.15 3434.53,2605.17 ; v1(3459.51,3614.4) 3447.51,3602.4 3434.53,3589.42 ; v1(3459.51,4598.65) 3447.51,4586.65 3434.53,4573.67 ; T1.6@3496.25,1760.3 3472.51,1760.3 3434.53,1722.32 3434.53,1663.35 ; T1.6@3496.25,2744.55 3472.51,2744.55 3434.53,2706.57 3434.53,2647.61 ; T1.6@3496.25,3728.8 3472.51,3728.8 3434.53,3690.82 3434.53,3631.86 ; T1.6@3496.25,4713.05 3472.51,4713.05 3434.53,4675.07 3434.53,4616.11 ; T1.3@3588.77,1685.49 3600.51,1685.49 v1(3600.51,1645.89) ; T1.3@3588.77,2669.74 3600.51,2669.74 v1(3600.51,2630.15) ; T1.3@3588.77,3654 3600.51,3654 v1(3600.51,3614.4) ; T1.3@3588.77,4638.25 3600.51,4638.25 v1(3600.51,4598.65) ; v1@4256.76,1221.44 4292.76,1185.44 MB6S.1@4336.6,1185.44 ; v1@4256.76,2205.69 4292.76,2169.69 MB6S.1@4336.6,2169.69 ; v1@4256.76,3189.95 4292.76,3153.95 MB6S.1@4336.6,3153.95 ; v1@4256.76,4174.2 4292.76,4138.2 MB6S.1@4336.6,4138.2 ; v1(4364.76,1422.44) 4364.76,1568.44 4418.78,1622.46 ; v1(4364.76,2406.69) 4364.76,2552.69 4418.78,2606.71 ; v1(4364.76,3390.95) 4364.76,3536.95 4418.78,3590.97 ; v1(4364.76,4375.2) 4364.76,4521.2 4418.78,4575.22 ; 4418.78,1685.44 4418.78,1664.9 ; 4418.78,2669.69 4418.78,2649.15 ; 4418.78,3653.95 4418.78,3633.41 ; 4418.78,4638.2 4418.78,4617.66 ; v1(4443.76,1647.44) 4431.76,1635.44 4418.78,1622.46 ; v1(4443.76,2631.69) 4431.76,2619.69 4418.78,2606.71 ; v1(4443.76,3615.95) 4431.76,3603.95 4418.78,3590.97 ; v1(4443.76,4600.2) 4431.76,4588.2 4418.78,4575.22 ; T1.6@4480.5,1761.84 4456.76,1761.84 4418.78,1723.86 4418.78,1664.9 ; T1.6@4480.5,2746.1 4456.76,2746.1 4418.78,2708.12 4418.78,2649.15 ; T1.6@4480.5,3730.35 4456.76,3730.35 4418.78,3692.37 4418.78,3633.41 ; T1.6@4480.5,4714.6 4456.76,4714.6 4418.78,4676.62 4418.78,4617.66 ; T1.3@4573.02,1687.04 4584.76,1687.04 v1(4584.76,1647.44) ; T1.3@4573.02,2671.29 4584.76,2671.29 v1(4584.76,2631.69) ; T1.3@4573.02,3655.54 4584.76,3655.54 v1(4584.76,3615.95) ; T1.3@4573.02,4639.8 4584.76,4639.8 v1(4584.76,4600.2) ; 1466.02,1617.82 1466.02,1660.26 ; 1466.02,2602.07 1466.02,2644.51 ; 1466.02,3586.32 1466.02,3628.76 ; 1466.02,4570.57 1466.02,4613.01 ; 2450.28,1619.37 2450.28,1661.81 ; 2450.28,2603.62 2450.28,2646.06 ; 2450.28,3587.87 2450.28,3630.31 ; 2450.28,4572.12 2450.28,4614.56 ; 3434.53,1620.91 3434.53,1663.35 ; 3434.53,2605.17 3434.53,2647.61 ; 3434.53,3589.42 3434.53,3631.86 ; 3434.53,4573.67 3434.53,4616.11 ; 4418.78,1622.46 4418.78,1664.9 ; 4418.78,2606.71 4418.78,2649.15 ; 4418.78,3590.97 4418.78,3633.41 ; 4418.78,4575.22 4418.78,4617.66
  Bottom Layer w6: v1(1302,1222.8) 1302,1243.8 1412,1353.8 v1(1412,1417.8) ; v1(1302,2207.05) 1302,2228.05 1412,2338.05 v1(1412,2402.05) ; v1(1302,3191.3) 1302,3212.3 1412,3322.3 v1(1412,3386.3) ; v1(1302,4175.55) 1302,4196.55 1412,4306.55 v1(1412,4370.55) ; v1(1491,1642.8) 1599,1642.8 v1(1632,1642.8) ; v1(1491,2627.05) 1599,2627.05 v1(1632,2627.05) ; v1(1491,3611.3) 1599,3611.3 v1(1632,3611.3) ; v1(1491,4595.55) 1599,4595.55 v1(1632,4595.55) ; v1(2286.26,1224.35) 2286.26,1245.35 2396.26,1355.35 v1(2396.26,1419.35) ; v1(2286.26,2208.6) 2286.26,2229.6 2396.26,2339.6 v1(2396.26,2403.6) ; v1(2286.26,3192.85) 2286.26,3213.85 2396.26,3323.85 v1(2396.26,3387.85) ; v1(2286.26,4177.1) 2286.26,4198.1 2396.26,4308.1 v1(2396.26,4372.1) ; v1(2475.26,1644.35) 2583.26,1644.35 v1(2616.26,1644.35) ; v1(2475.26,2628.6) 2583.26,2628.6 v1(2616.26,2628.6) ; v1(2475.26,3612.85) 2583.26,3612.85 v1(2616.26,3612.85) ; v1(2475.26,4597.1) 2583.26,4597.1 v1(2616.26,4597.1) ; v1(3270.51,1225.89) 3270.51,1246.89 3380.51,1356.89 v1(3380.51,1420.89) ; v1(3270.51,2210.15) 3270.51,2231.15 3380.51,2341.15 v1(3380.51,2405.15) ; v1(3270.51,3194.4) 3270.51,3215.4 3380.51,3325.4 v1(3380.51,3389.4) ; v1(3270.51,4178.65) 3270.51,4199.65 3380.51,4309.65 v1(3380.51,4373.65) ; v1(3459.51,1645.89) 3567.51,1645.89 v1(3600.51,1645.89) ; v1(3459.51,2630.15) 3567.51,2630.15 v1(3600.51,2630.15) ; v1(3459.51,3614.4) 3567.51,3614.4 v1(3600.51,3614.4) ; v1(3459.51,4598.65) 3567.51,4598.65 v1(3600.51,4598.65) ; v1(4254.76,1227.44) 4254.76,1248.44 4364.76,1358.44 v1(4364.76,1422.44) ; v1(4254.76,2211.69) 4254.76,2232.69 4364.76,2342.69 v1(4364.76,2406.69) ; v1(4254.76,3195.95) 4254.76,3216.95 4364.76,3326.95 v1(4364.76,3390.95) ; v1(4254.76,4180.2) 4254.76,4201.2 4364.76,4311.2 v1(4364.76,4375.2) ; v1(4443.76,1647.44) 4551.76,1647.44 v1(4584.76,1647.44) ; v1(4443.76,2631.69) 4551.76,2631.69 v1(4584.76,2631.69) ; v1(4443.76,3615.95) 4551.76,3615.95 v1(4584.76,3615.95) ; v1(4443.76,4600.2) 4551.76,4600.2 v1(4584.76,4600.2)
GND: M1.36 MB6S.2 | length 8496.2
  Top Layer w6: M1.36@1137,1050.8 1217,1130.8 1499,1130.8 1549,1180.8 MB6S.2@1614.16,1180.8 ; M1.36@1137,2035.05 1217,2115.05 1499,2115.05 1549,2165.05 MB6S.2@1614.16,2165.05 ; M1.36@1137,3019.3 1217,3099.3 1499,3099.3 1549,3149.3 MB6S.2@1614.16,3149.3 ; M1.36@1137,4003.55 1217,4083.55 1499,4083.55 1549,4133.55 MB6S.2@1614.16,4133.55 ; M1.36@2121.25,1052.35 2201.25,1132.35 2483.26,1132.35 2533.26,1182.35 MB6S.2@2598.41,1182.35 ; M1.36@2121.25,2036.6 2201.25,2116.6 2483.26,2116.6 2533.26,2166.6 MB6S.2@2598.41,2166.6 ; M1.36@2121.25,3020.85 2201.25,3100.85 2483.26,3100.85 2533.26,3150.85 MB6S.2@2598.41,3150.85 ; M1.36@2121.25,4005.1 2201.25,4085.1 2483.26,4085.1 2533.26,4135.1 MB6S.2@2598.41,4135.1 ; M1.36@3105.5,1053.89 3185.5,1133.89 3467.51,1133.89 3517.51,1183.89 MB6S.2@3582.67,1183.89 ; M1.36@3105.5,2038.15 3185.5,2118.15 3467.51,2118.15 3517.51,2168.15 MB6S.2@3582.67,2168.15 ; M1.36@3105.5,3022.4 3185.5,3102.4 3467.51,3102.4 3517.51,3152.4 MB6S.2@3582.67,3152.4 ; M1.36@3105.5,4006.65 3185.5,4086.65 3467.51,4086.65 3517.51,4136.65 MB6S.2@3582.67,4136.65 ; M1.36@4089.75,1055.44 4169.75,1135.44 4451.76,1135.44 4501.76,1185.44 MB6S.2@4566.92,1185.44 ; M1.36@4089.75,2039.69 4169.75,2119.69 4451.76,2119.69 4501.76,2169.69 MB6S.2@4566.92,2169.69 ; M1.36@4089.75,3023.95 4169.75,3103.95 4451.76,3103.95 4501.76,3153.95 MB6S.2@4566.92,3153.95 ; M1.36@4089.75,4008.2 4169.75,4088.2 4451.76,4088.2 4501.76,4138.2 MB6S.2@4566.92,4138.2
NetC1_2: C1.2 D3.2 T2.3 | length 13341.4
  Top Layer w6: C1.2@1279,1757.53 1312,1757.53 ; C1.2@1279,2741.78 1312,2741.78 ; C1.2@1279,3726.04 1312,3726.04 ; C1.2@1279,4710.29 1312,4710.29 ; v1(1378,1610.8) 1347,1641.8 1347,1722.53 1312,1757.53 ; v1(1378,2595.05) 1347,2626.05 1347,2706.78 1312,2741.78 ; v1(1378,3579.3) 1347,3610.3 1347,3691.04 1312,3726.04 ; v1(1378,4563.55) 1347,4594.55 1347,4675.29 1312,4710.29 ; D3.2@1389,1763.32 1336.79,1763.32 1331,1757.53 1312,1757.53 ; D3.2@1389,2747.57 1336.79,2747.57 1331,2741.78 1312,2741.78 ; D3.2@1389,3731.82 1336.79,3731.82 1331,3726.04 1312,3726.04 ; D3.2@1389,4716.07 1336.79,4716.07 1331,4710.29 1312,4710.29 ; T2.3@1590.26,1397.4 v1(1664,1397.4) ; T2.3@1590.26,2381.65 v1(1664,2381.65) ; T2.3@1590.26,3365.9 v1(1664,3365.9) ; T2.3@1590.26,4350.15 v1(1664,4350.15) ; C1.2@2263.26,1759.08 2296.26,1759.08 ; C1.2@2263.26,2743.33 2296.26,2743.33 ; C1.2@2263.26,3727.58 2296.26,3727.58 ; C1.2@2263.26,4711.84 2296.26,4711.84 ; v1(2362.26,1612.35) 2331.26,1643.35 2331.26,1724.08 2296.26,1759.08 ; v1(2362.26,2596.6) 2331.26,2627.6 2331.26,2708.33 2296.26,2743.33 ; v1(2362.26,3580.85) 2331.26,3611.85 2331.26,3692.58 2296.26,3727.58 ; v1(2362.26,4565.1) 2331.26,4596.1 2331.26,4676.84 2296.26,4711.84 ; D3.2@2373.26,1764.87 2321.04,1764.87 2315.26,1759.08 2296.26,1759.08 ; D3.2@2373.26,2749.12 2321.04,2749.12 2315.26,2743.33 2296.26,2743.33 ; D3.2@2373.26,3733.37 2321.04,3733.37 2315.26,3727.58 2296.26,3727.58 ; D3.2@2373.26,4717.62 2321.04,4717.62 2315.26,4711.84 2296.26,4711.84 ; T2.3@2574.52,1398.94 v1(2648.26,1398.94) ; T2.3@2574.52,2383.2 v1(2648.26,2383.2) ; T2.3@2574.52,3367.45 v1(2648.26,3367.45) ; T2.3@2574.52,4351.7 v1(2648.26,4351.7) ; C1.2@3247.51,1760.63 3280.51,1760.63 ; C1.2@3247.51,2744.88 3280.51,2744.88 ; C1.2@3247.51,3729.13 3280.51,3729.13 ; C1.2@3247.51,4713.38 3280.51,4713.38 ; v1(3346.51,1613.89) 3315.51,1644.89 3315.51,1725.63 3280.51,1760.63 ; v1(3346.51,2598.15) 3315.51,2629.15 3315.51,2709.88 3280.51,2744.88 ; v1(3346.51,3582.4) 3315.51,3613.4 3315.51,3694.13 3280.51,3729.13 ; v1(3346.51,4566.65) 3315.51,4597.65 3315.51,4678.38 3280.51,4713.38 ; D3.2@3357.51,1766.41 3305.29,1766.41 3299.51,1760.63 3280.51,1760.63 ; D3.2@3357.51,2750.67 3305.29,2750.67 3299.51,2744.88 3280.51,2744.88 ; D3.2@3357.51,3734.92 3305.29,3734.92 3299.51,3729.13 3280.51,3729.13 ; D3.2@3357.51,4719.17 3305.29,4719.17 3299.51,4713.38 3280.51,4713.38 ; T2.3@3558.77,1400.49 v1(3632.51,1400.49) ; T2.3@3558.77,2384.74 v1(3632.51,2384.74) ; T2.3@3558.77,3369 v1(3632.51,3369) ; T2.3@3558.77,4353.25 v1(3632.51,4353.25) ; C1.2@4231.76,1762.18 4264.76,1762.18 ; C1.2@4231.76,2746.43 4264.76,2746.43 ; C1.2@4231.76,3730.68 4264.76,3730.68 ; C1.2@4231.76,4714.93 4264.76,4714.93 ; v1(4330.76,1615.44) 4299.76,1646.44 4299.76,1727.18 4264.76,1762.18 ; v1(4330.76,2599.69) 4299.76,2630.69 4299.76,2711.43 4264.76,2746.43 ; v1(4330.76,3583.95) 4299.76,3614.95 4299.76,3695.68 4264.76,3730.68 ; v1(4330.76,4568.2) 4299.76,4599.2 4299.76,4679.93 4264.76,4714.93 ; D3.2@4341.76,1767.96 4289.55,1767.96 4283.76,1762.18 4264.76,1762.18 ; D3.2@4341.76,2752.21 4289.55,2752.21 4283.76,2746.43 4264.76,2746.43 ; D3.2@4341.76,3736.47 4289.55,3736.47 4283.76,3730.68 4264.76,3730.68 ; D3.2@4341.76,4720.72 4289.55,4720.72 4283.76,4714.93 4264.76,4714.93 ; T2.3@4543.02,1402.04 v1(4616.76,1402.04) ; T2.3@4543.02,2386.29 v1(4616.76,2386.29) ; T2.3@4543.02,3370.54 v1(4616.76,3370.54) ; T2.3@4543.02,4354.8 v1(4616.76,4354.8)
  Bottom Layer w6: v1(1378,1610.8) 1620,1610.8 1664,1566.8 v1(1664,1397.4) ; v1(1378,2595.05) 1620,2595.05 1664,2551.05 v1(1664,2381.65) ; v1(1378,3579.3) 1620,3579.3 1664,3535.3 v1(1664,3365.9) ; v1(1378,4563.55) 1620,4563.55 1664,4519.55 v1(1664,4350.15) ; v1(2362.26,1612.35) 2604.26,1612.35 2648.26,1568.35 v1(2648.26,1398.94) ; v1(2362.26,2596.6) 2604.26,2596.6 2648.26,2552.6 v1(2648.26,2383.2) ; v1(2362.26,3580.85) 2604.26,3580.85 2648.26,3536.85 v1(2648.26,3367.45) ; v1(2362.26,4565.1) 2604.26,4565.1 2648.26,4521.1 v1(2648.26,4351.7) ; v1(3346.51,1613.89) 3588.51,1613.89 3632.51,1569.89 v1(3632.51,1400.49) ; v1(3346.51,2598.15) 3588.51,2598.15 3632.51,2554.15 v1(3632.51,2384.74) ; v1(3346.51,3582.4) 3588.51,3582.4 3632.51,3538.4 v1(3632.51,3369) ; v1(3346.51,4566.65) 3588.51,4566.65 3632.51,4522.65 v1(3632.51,4353.25) ; v1(4330.76,1615.44) 4572.76,1615.44 4616.76,1571.44 v1(4616.76,1402.04) ; v1(4330.76,2599.69) 4572.76,2599.69 4616.76,2555.69 v1(4616.76,2386.29) ; v1(4330.76,3583.95) 4572.76,3583.95 4616.76,3539.95 v1(4616.76,3370.54) ; v1(4330.76,4568.2) 4572.76,4568.2 4616.76,4524.2 v1(4616.76,4354.8)
NetC2_2: C2.2 D4.1 T2.6 | length 6492.8
  Top Layer w6: C2.2@1339.44,1305.8 1432,1305.8 1442,1315.8 1488,1315.8 ; C2.2@1339.44,2290.05 1432,2290.05 1442,2300.05 1488,2300.05 ; C2.2@1339.44,3274.3 1432,3274.3 1442,3284.3 1488,3284.3 ; C2.2@1339.44,4258.55 1432,4258.55 1442,4268.55 1488,4268.55 ; T2.6@1489,1472.2 1455.41,1472.2 1439,1455.8 1439,1364.8 1473.5,1330.3 1488,1315.8 ; T2.6@1489,2456.45 1455.41,2456.45 1439,2440.05 1439,2349.05 1473.5,2314.55 1488,2300.05 ; T2.6@1489,3440.7 1455.41,3440.7 1439,3424.3 1439,3333.3 1473.5,3298.8 1488,3284.3 ; T2.6@1489,4424.96 1455.41,4424.96 1439,4408.55 1439,4317.55 1473.5,4283.05 1488,4268.55 ; D4.1@1524,1315.8 1488,1315.8 ; D4.1@1524,2300.05 1488,2300.05 ; D4.1@1524,3284.3 1488,3284.3 ; D4.1@1524,4268.55 1488,4268.55 ; C2.2@2323.69,1307.35 2416.26,1307.35 2426.26,1317.35 2472.26,1317.35 ; C2.2@2323.69,2291.6 2416.26,2291.6 2426.26,2301.6 2472.26,2301.6 ; C2.2@2323.69,3275.85 2416.26,3275.85 2426.26,3285.85 2472.26,3285.85 ; C2.2@2323.69,4260.1 2416.26,4260.1 2426.26,4270.1 2472.26,4270.1 ; T2.6@2473.26,1473.75 2439.66,1473.75 2423.26,1457.35 2423.26,1366.35 2457.76,1331.85 2472.26,1317.35 ; T2.6@2473.26,2458 2439.66,2458 2423.26,2441.6 2423.26,2350.6 2457.76,2316.1 2472.26,2301.6 ; T2.6@2473.26,3442.25 2439.66,3442.25 2423.26,3425.85 2423.26,3334.85 2457.76,3300.35 2472.26,3285.85 ; T2.6@2473.26,4426.5 2439.66,4426.5 2423.26,4410.1 2423.26,4319.1 2457.76,4284.6 2472.26,4270.1 ; D4.1@2508.26,1317.35 2472.26,1317.35 ; D4.1@2508.26,2301.6 2472.26,2301.6 ; D4.1@2508.26,3285.85 2472.26,3285.85 ; D4.1@2508.26,4270.1 2472.26,4270.1 ; C2.2@3307.94,1308.89 3400.51,1308.89 3410.51,1318.89 3456.51,1318.89 ; C2.2@3307.94,2293.15 3400.51,2293.15 3410.51,2303.15 3456.51,2303.15 ; C2.2@3307.94,3277.4 3400.51,3277.4 3410.51,3287.4 3456.51,3287.4 ; C2.2@3307.94,4261.65 3400.51,4261.65 3410.51,4271.65 3456.51,4271.65 ; T2.6@3457.51,1475.3 3423.91,1475.3 3407.51,1458.89 3407.51,1367.89 3442.01,1333.39 3456.51,1318.89 ; T2.6@3457.51,2459.55 3423.91,2459.55 3407.51,2443.15 3407.51,2352.15 3442.01,2317.65 3456.51,2303.15 ; T2.6@3457.51,3443.8 3423.91,3443.8 3407.51,3427.4 3407.51,3336.4 3442.01,3301.9 3456.51,3287.4 ; T2.6@3457.51,4428.05 3423.91,4428.05 3407.51,4411.65 3407.51,4320.65 3442.01,4286.15 3456.51,4271.65 ; D4.1@3492.51,1318.89 3456.51,1318.89 ; D4.1@3492.51,2303.15 3456.51,2303.15 ; D4.1@3492.51,3287.4 3456.51,3287.4 ; D4.1@3492.51,4271.65 3456.51,4271.65 ; C2.2@4292.19,1310.44 4384.76,1310.44 4394.76,1320.44 4440.76,1320.44 ; C2.2@4292.19,2294.69 4384.76,2294.69 4394.76,2304.69 4440.76,2304.69 ; C2.2@4292.19,3278.95 4384.76,3278.95 4394.76,3288.95 4440.76,3288.95 ; C2.2@4292.19,4263.2 4384.76,4263.2 4394.76,4273.2 4440.76,4273.2 ; T2.6@4441.76,1476.84 4408.16,1476.84 4391.76,1460.44 4391.76,1369.44 4426.26,1334.94 4440.76,1320.44 ; T2.6@4441.76,2461.1 4408.16,2461.1 4391.76,2444.69 4391.76,2353.69 4426.26,2319.19 4440.76,2304.69 ; T2.6@4441.76,3445.35 4408.16,3445.35 4391.76,3428.95 4391.76,3337.95 4426.26,3303.45 4440.76,3288.95 ; T2.6@4441.76,4429.6 4408.16,4429.6 4391.76,4413.2 4391.76,4322.2 4426.26,4287.7 4440.76,4273.2 ; D4.1@4476.76,1320.44 4440.76,1320.44 ; D4.1@4476.76,2304.69 4440.76,2304.69 ; D4.1@4476.76,3288.95 4440.76,3288.95 ; D4.1@4476.76,4273.2 4440.76,4273.2
NetD1_2: D1.2 T1.1 | length 4764.4
  Top Layer w6: 1591.67,1746.86 1586,1741.2 ; 1591.67,2731.12 1586,2725.45 ; 1591.67,3715.37 1586,3709.71 ; 1591.67,4699.62 1586,4693.96 ; T1.1@1620.26,1757.2 1602,1757.2 1586,1741.2 ; T1.1@1620.26,2741.45 1602,2741.45 1586,2725.45 ; T1.1@1620.26,3725.7 1602,3725.7 1586,3709.71 ; T1.1@1620.26,4709.96 1602,4709.96 1586,4693.96 ; D1.2@1714,1603.32 1714,1603.8 1666,1603.8 1653.5,1616.3 1619.5,1616.3 1607,1628.8 1574,1661.8 1574,1729.2 1586,1741.2 ; D1.2@1714,2587.57 1714,2588.05 1666,2588.05 1653.5,2600.55 1619.5,2600.55 1607,2613.05 1574,2646.05 1574,2713.45 1586,2725.45 ; D1.2@1714,3571.82 1714,3572.3 1666,3572.3 1653.5,3584.8 1619.5,3584.8 1607,3597.3 1574,3630.3 1574,3697.71 1586,3709.71 ; D1.2@1714,4556.07 1714,4556.55 1666,4556.55 1653.5,4569.05 1619.5,4569.05 1607,4581.55 1574,4614.55 1574,4681.96 1586,4693.96 ; 2575.92,1748.41 2570.26,1742.75 ; 2575.92,2732.66 2570.26,2727 ; 2575.92,3716.92 2570.26,3711.25 ; 2575.92,4701.17 2570.26,4695.51 ; T1.1@2604.52,1758.75 2586.25,1758.75 2570.26,1742.75 ; T1.1@2604.52,2743 2586.25,2743 2570.26,2727 ; T1.1@2604.52,3727.25 2586.25,3727.25 2570.26,3711.25 ; T1.1@2604.52,4711.5 2586.25,4711.5 2570.26,4695.51 ; D1.2@2698.26,1604.87 2698.26,1605.35 2650.26,1605.35 2637.76,1617.85 2603.76,1617.85 2591.26,1630.35 2558.26,1663.35 2558.26,1730.75 2570.26,1742.75 ; D1.2@2698.26,2589.12 2698.26,2589.6 2650.26,2589.6 2637.76,2602.1 2603.76,2602.1 2591.26,2614.6 2558.26,2647.6 2558.26,2715 2570.26,2727 ; D1.2@2698.26,3573.37 2698.26,3573.85 2650.26,3573.85 2637.76,3586.35 2603.76,3586.35 2591.26,3598.85 2558.26,3631.85 2558.26,3699.25 2570.26,3711.25 ; D1.2@2698.26,4557.62 2698.26,4558.1 2650.26,4558.1 2637.76,4570.6 2603.76,4570.6 2591.26,4583.1 2558.26,4616.1 2558.26,4683.51 2570.26,4695.51 ; 3560.17,1749.96 3554.51,1744.3 ; 3560.17,2734.21 3554.51,2728.55 ; 3560.17,3718.46 3554.51,3712.8 ; 3560.17,4702.72 3554.51,4697.05 ; T1.1@3588.77,1760.3 3570.51,1760.3 3554.51,1744.3 ; T1.1@3588.77,2744.55 3570.51,2744.55 3554.51,2728.55 ; T1.1@3588.77,3728.8 3570.51,3728.8 3554.51,3712.8 ; T1.1@3588.77,4713.05 3570.51,4713.05 3554.51,4697.05 ; D1.2@3682.51,1606.41 3682.51,1606.89 3634.51,1606.89 3622.01,1619.39 3588.01,1619.39 3575.51,1631.89 3542.51,1664.89 3542.51,1732.3 3554.51,1744.3 ; D1.2@3682.51,2590.67 3682.51,2591.15 3634.51,2591.15 3622.01,2603.65 3588.01,2603.65 3575.51,2616.15 3542.51,2649.15 3542.51,2716.55 3554.51,2728.55 ; D1.2@3682.51,3574.92 3682.51,3575.4 3634.51,3575.4 3622.01,3587.9 3588.01,3587.9 3575.51,3600.4 3542.51,3633.4 3542.51,3700.8 3554.51,3712.8 ; D1.2@3682.51,4559.17 3682.51,4559.65 3634.51,4559.65 3622.01,4572.15 3588.01,4572.15 3575.51,4584.65 3542.51,4617.65 3542.51,4685.05 3554.51,4697.05 ; 4544.42,1751.51 4538.76,1745.85 ; 4544.42,2735.76 4538.76,2730.1 ; 4544.42,3720.01 4538.76,3714.35 ; 4544.42,4704.26 4538.76,4698.6 ; T1.1@4573.02,1761.84 4554.76,1761.84 4538.76,1745.85 ; T1.1@4573.02,2746.1 4554.76,2746.1 4538.76,2730.1 ; T1.1@4573.02,3730.35 4554.76,3730.35 4538.76,3714.35 ; T1.1@4573.02,4714.6 4554.76,4714.6 4538.76,4698.6 ; D1.2@4666.76,1607.96 4666.76,1608.44 4618.76,1608.44 4606.26,1620.94 4572.26,1620.94 4559.76,1633.44 4526.76,1666.44 4526.76,1733.85 4538.76,1745.85 ; D1.2@4666.76,2592.21 4666.76,2592.69 4618.76,2592.69 4606.26,2605.19 4572.26,2605.19 4559.76,2617.69 4526.76,2650.69 4526.76,2718.1 4538.76,2730.1 ; D1.2@4666.76,3576.47 4666.76,3576.95 4618.76,3576.95 4606.26,3589.45 4572.26,3589.45 4559.76,3601.95 4526.76,3634.95 4526.76,3702.35 4538.76,3714.35 ; D1.2@4666.76,4560.72 4666.76,4561.2 4618.76,4561.2 4606.26,4573.7 4572.26,4573.7 4559.76,4586.2 4526.76,4619.2 4526.76,4686.6 4538.76,4698.6
NetD2_1: D2.1 T1.4 | length 1633.9
  Top Layer w6: T1.4@1527.74,1682.4 1529,1681.14 D2.1@1529,1580.8 ; T1.4@1527.74,2666.65 1529,2665.39 D2.1@1529,2565.05 ; T1.4@1527.74,3650.9 1529,3649.64 D2.1@1529,3549.3 ; T1.4@1527.74,4635.15 1529,4633.89 D2.1@1529,4533.55 ; T1.4@2512,1683.94 2513.26,1682.68 D2.1@2513.26,1582.35 ; T1.4@2512,2668.2 2513.26,2666.94 D2.1@2513.26,2566.6 ; T1.4@2512,3652.45 2513.26,3651.19 D2.1@2513.26,3550.85 ; T1.4@2512,4636.7 2513.26,4635.44 D2.1@2513.26,4535.1 ; T1.4@3496.25,1685.49 3497.51,1684.23 D2.1@3497.51,1583.89 ; T1.4@3496.25,2669.74 3497.51,2668.48 D2.1@3497.51,2568.15 ; T1.4@3496.25,3654 3497.51,3652.74 D2.1@3497.51,3552.4 ; T1.4@3496.25,4638.25 3497.51,4636.99 D2.1@3497.51,4536.65 ; T1.4@4480.5,1687.04 4481.76,1685.78 D2.1@4481.76,1585.44 ; T1.4@4480.5,2671.29 4481.76,2670.03 D2.1@4481.76,2569.69 ; T1.4@4480.5,3655.54 4481.76,3654.28 D2.1@4481.76,3553.95 ; T1.4@4480.5,4639.8 4481.76,4638.54 D2.1@4481.76,4538.2
NetD3_1: D3.1 R1.1 | length 8027
  Top Layer w6: D3.1@1389,1670.8 1389,1700.8 1439,1750.8 1439,1775.8 1484,1820.8 1606,1820.8 1619,1807.8 ; D3.1@1389,2655.05 1389,2685.05 1439,2735.05 1439,2760.05 1484,2805.05 1606,2805.05 1619,2792.05 ; D3.1@1389,3639.3 1389,3669.3 1439,3719.3 1439,3744.3 1484,3789.3 1606,3789.3 1619,3776.3 ; D3.1@1389,4623.55 1389,4653.55 1439,4703.55 1439,4728.55 1484,4773.55 1606,4773.55 1619,4760.55 ; 1610.64,1816.16 1619,1807.8 ; 1610.64,2800.41 1619,2792.05 ; 1610.64,3784.67 1619,3776.3 ; 1610.64,4768.92 1619,4760.55 ; R1.1@1739,1761.23 1739,1796.8 1728,1807.8 1619,1807.8 ; R1.1@1739,2745.48 1739,2781.05 1728,2792.05 1619,2792.05 ; R1.1@1739,3729.73 1739,3765.3 1728,3776.3 1619,3776.3 ; R1.1@1739,4713.99 1739,4749.55 1728,4760.55 1619,4760.55 ; D3.1@2373.26,1672.35 2373.26,1702.35 2423.26,1752.35 2423.26,1777.35 2468.26,1822.35 2590.26,1822.35 2603.26,1809.35 ; D3.1@2373.26,2656.6 2373.26,2686.6 2423.26,2736.6 2423.26,2761.6 2468.26,2806.6 2590.26,2806.6 2603.26,2793.6 ; D3.1@2373.26,3640.85 2373.26,3670.85 2423.26,3720.85 2423.26,3745.85 2468.26,3790.85 2590.26,3790.85 2603.26,3777.85 ; D3.1@2373.26,4625.1 2373.26,4655.1 2423.26,4705.1 2423.26,4730.1 2468.26,4775.1 2590.26,4775.1 2603.26,4762.1 ; 2594.89,1817.71 2603.26,1809.35 ; 2594.89,2801.96 2603.26,2793.6 ; 2594.89,3786.21 2603.26,3777.85 ; 2594.89,4770.47 2603.26,4762.1 ; R1.1@2723.26,1762.78 2723.26,1798.35 2712.26,1809.35 2603.26,1809.35 ; R1.1@2723.26,2747.03 2723.26,2782.6 2712.26,2793.6 2603.26,2793.6 ; R1.1@2723.26,3731.28 2723.26,3766.85 2712.26,3777.85 2603.26,3777.85 ; R1.1@2723.26,4715.53 2723.26,4751.1 2712.26,4762.1 2603.26,4762.1 ; D3.1@3357.51,1673.89 3357.51,1703.89 3407.51,1753.89 3407.51,1778.89 3452.51,1823.89 3574.51,1823.89 3587.51,1810.89 ; D3.1@3357.51,2658.15 3357.51,2688.15 3407.51,2738.15 3407.51,2763.15 3452.51,2808.15 3574.51,2808.15 3587.51,2795.15 ; D3.1@3357.51,3642.4 3357.51,3672.4 3407.51,3722.4 3407.51,3747.4 3452.51,3792.4 3574.51,3792.4 3587.51,3779.4 ; D3.1@3357.51,4626.65 3357.51,4656.65 3407.51,4706.65 3407.51,4731.65 3452.51,4776.65 3574.51,4776.65 3587.51,4763.65 ; 3579.14,1819.26 3587.51,1810.89 ; 3579.14,2803.51 3587.51,2795.15 ; 3579.14,3787.76 3587.51,3779.4 ; 3579.14,4772.01 3587.51,4763.65 ; R1.1@3707.51,1764.33 3707.51,1799.89 3696.51,1810.89 3587.51,1810.89 ; R1.1@3707.51,2748.58 3707.51,2784.15 3696.51,2795.15 3587.51,2795.15 ; R1.1@3707.51,3732.83 3707.51,3768.4 3696.51,3779.4 3587.51,3779.4 ; R1.1@3707.51,4717.08 3707.51,4752.65 3696.51,4763.65 3587.51,4763.65 ; D3.1@4341.76,1675.44 4341.76,1705.44 4391.76,1755.44 4391.76,1780.44 4436.76,1825.44 4558.76,1825.44 4571.76,1812.44 ; D3.1@4341.76,2659.69 4341.76,2689.69 4391.76,2739.69 4391.76,2764.69 4436.76,2809.69 4558.76,2809.69 4571.76,2796.69 ; D3.1@4341.76,3643.95 4341.76,3673.95 4391.76,3723.95 4391.76,3748.95 4436.76,3793.95 4558.76,3793.95 4571.76,3780.95 ; D3.1@4341.76,4628.2 4341.76,4658.2 4391.76,4708.2 4391.76,4733.2 4436.76,4778.2 4558.76,4778.2 4571.76,4765.2 ; 4563.4,1820.81 4571.76,1812.44 ; 4563.4,2805.06 4571.76,2796.69 ; 4563.4,3789.31 4571.76,3780.95 ; 4563.4,4773.56 4571.76,4765.2 ; R1.1@4691.76,1765.87 4691.76,1801.44 4680.76,1812.44 4571.76,1812.44 ; R1.1@4691.76,2750.13 4691.76,2785.69 4680.76,2796.69 4571.76,2796.69 ; R1.1@4691.76,3734.38 4691.76,3769.95 4680.76,3780.95 4571.76,3780.95 ; R1.1@4691.76,4718.63 4691.76,4754.2 4680.76,4765.2 4571.76,4765.2
NetD4_2: D4.2 R2.1 | length 1595.7
  Top Layer w6: D4.2@1616.52,1315.8 1662,1315.8 1667.44,1310.37 R2.1@1714,1310.37 ; D4.2@1616.52,2300.05 1662,2300.05 1667.44,2294.62 R2.1@1714,2294.62 ; D4.2@1616.52,3284.3 1662,3284.3 1667.44,3278.87 R2.1@1714,3278.87 ; D4.2@1616.52,4268.55 1662,4268.55 1667.44,4263.12 R2.1@1714,4263.12 ; D4.2@2600.78,1317.35 2646.26,1317.35 2651.69,1311.91 R2.1@2698.26,1311.91 ; D4.2@2600.78,2301.6 2646.26,2301.6 2651.69,2296.17 R2.1@2698.26,2296.17 ; D4.2@2600.78,3285.85 2646.26,3285.85 2651.69,3280.42 R2.1@2698.26,3280.42 ; D4.2@2600.78,4270.1 2646.26,4270.1 2651.69,4264.67 R2.1@2698.26,4264.67 ; D4.2@3585.03,1318.89 3630.51,1318.89 3635.94,1313.46 R2.1@3682.51,1313.46 ; D4.2@3585.03,2303.15 3630.51,2303.15 3635.94,2297.71 R2.1@3682.51,2297.71 ; D4.2@3585.03,3287.4 3630.51,3287.4 3635.94,3281.97 R2.1@3682.51,3281.97 ; D4.2@3585.03,4271.65 3630.51,4271.65 3635.94,4266.22 R2.1@3682.51,4266.22 ; D4.2@4569.28,1320.44 4614.76,1320.44 4620.19,1315.01 R2.1@4666.76,1315.01 ; D4.2@4569.28,2304.69 4614.76,2304.69 4620.19,2299.26 R2.1@4666.76,2299.26 ; D4.2@4569.28,3288.95 4614.76,3288.95 4620.19,3283.51 R2.1@4666.76,3283.51 ; D4.2@4569.28,4273.2 4614.76,4273.2 4620.19,4267.77 R2.1@4666.76,4267.77